# Altium PCB FOC-Lite.PcbDoc
Units mil, origin at the board's own origin, x right, y up, seen from the top; angles counter-clockwise.
Board outline 1339.16 x 1339.16 mil, 4 copper layers (Top1, Gnd2, Signal3, Bottom4), stack 41.067 mil thick; 59 components, 48 nets, 243 pads, 82 vias.
Unrouted connection lines stored in the file: 57.
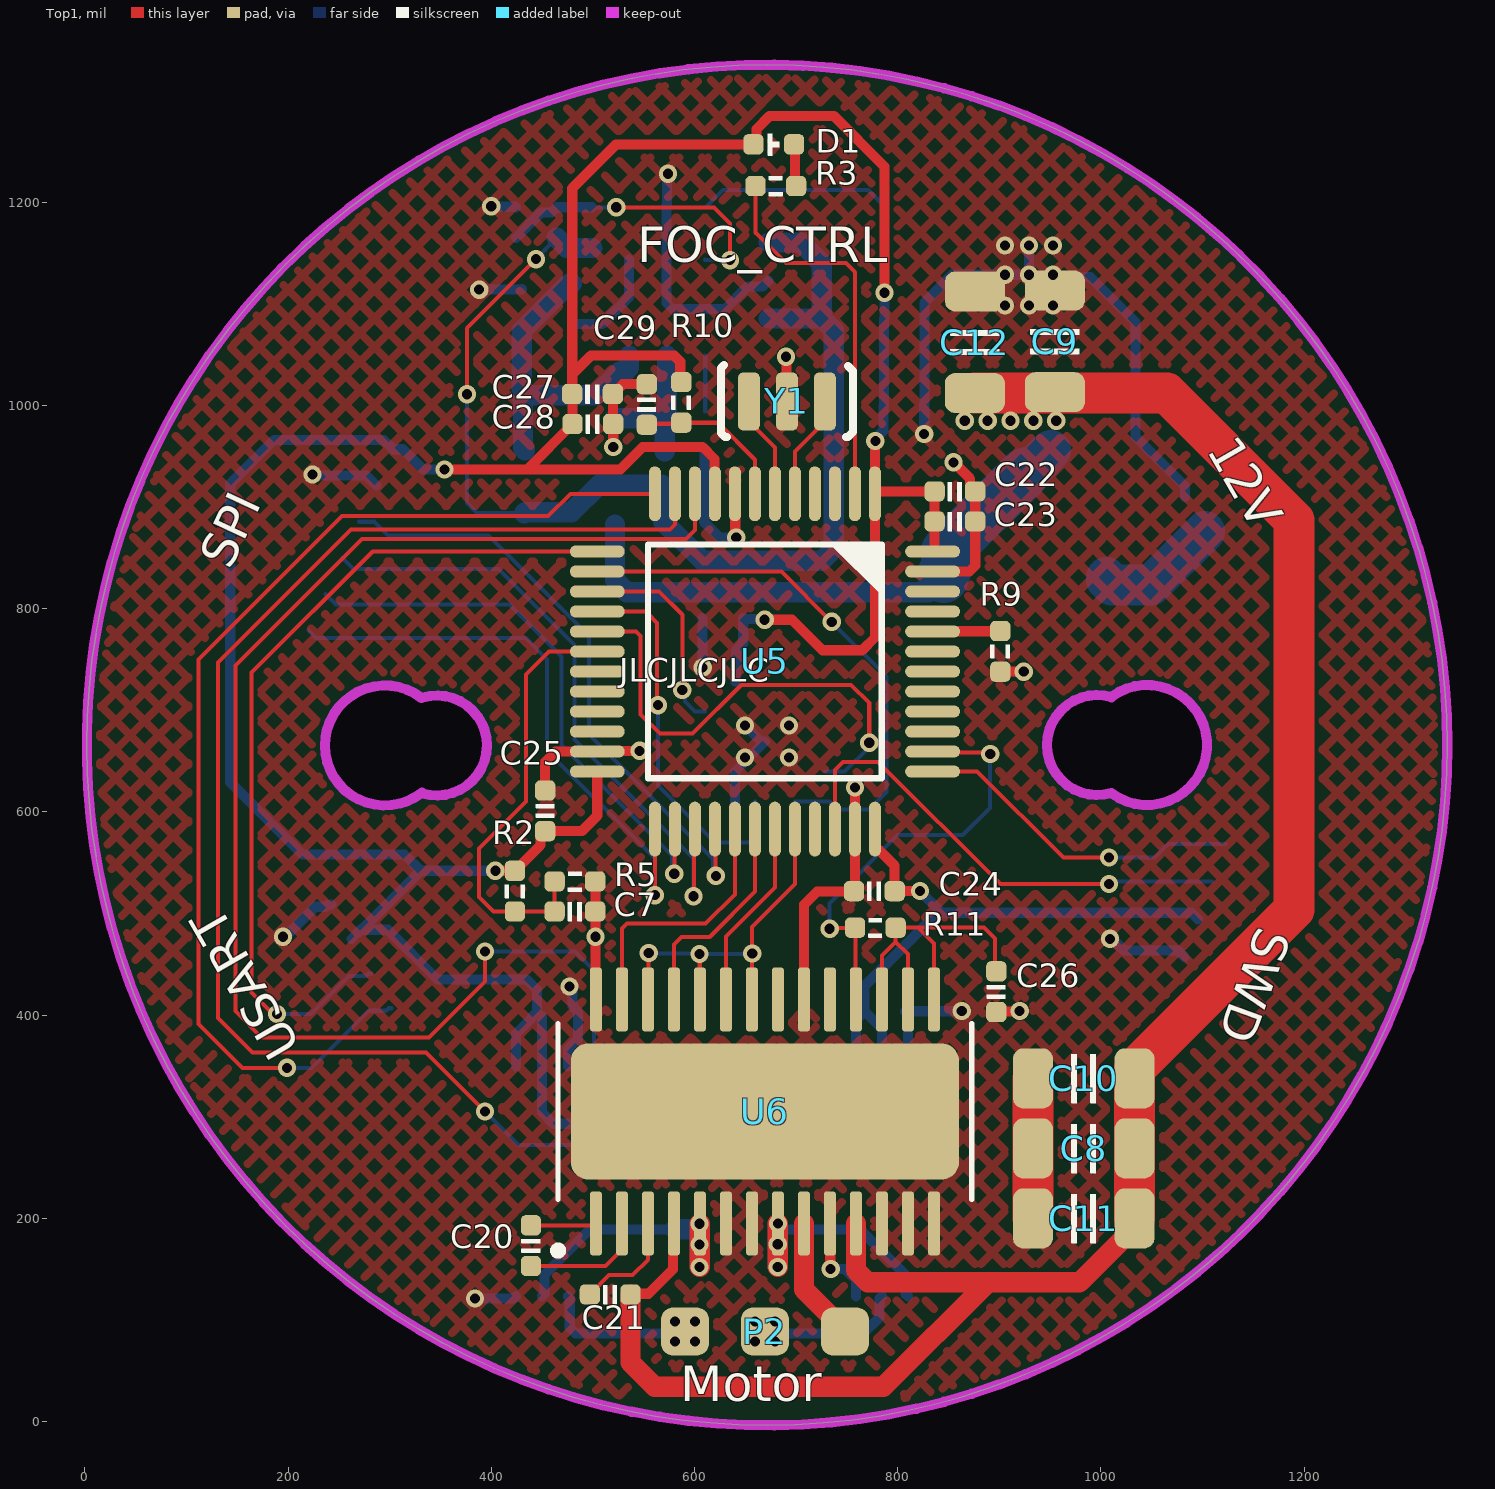
[diagram p0: Top1 view]
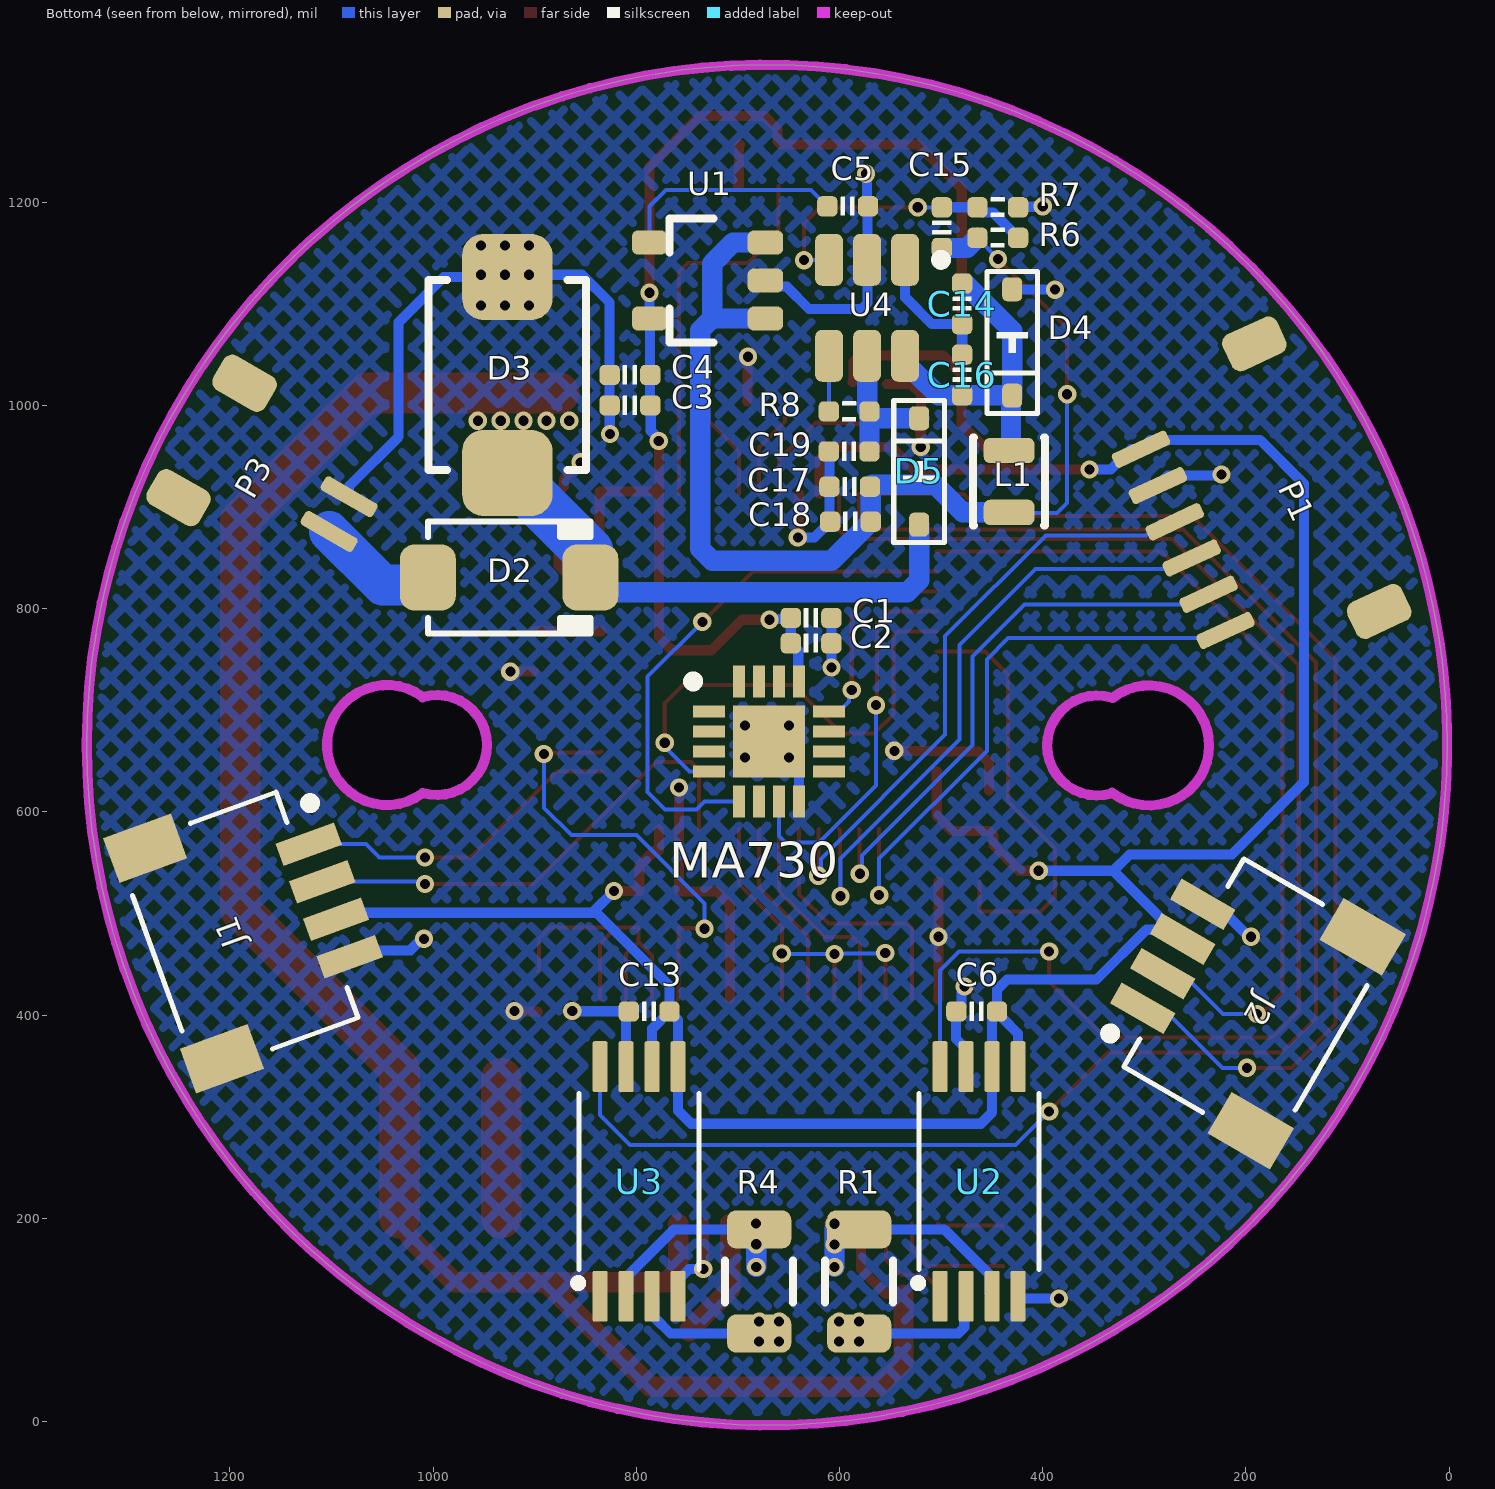
[diagram p1: Bottom4 view, seen from below]
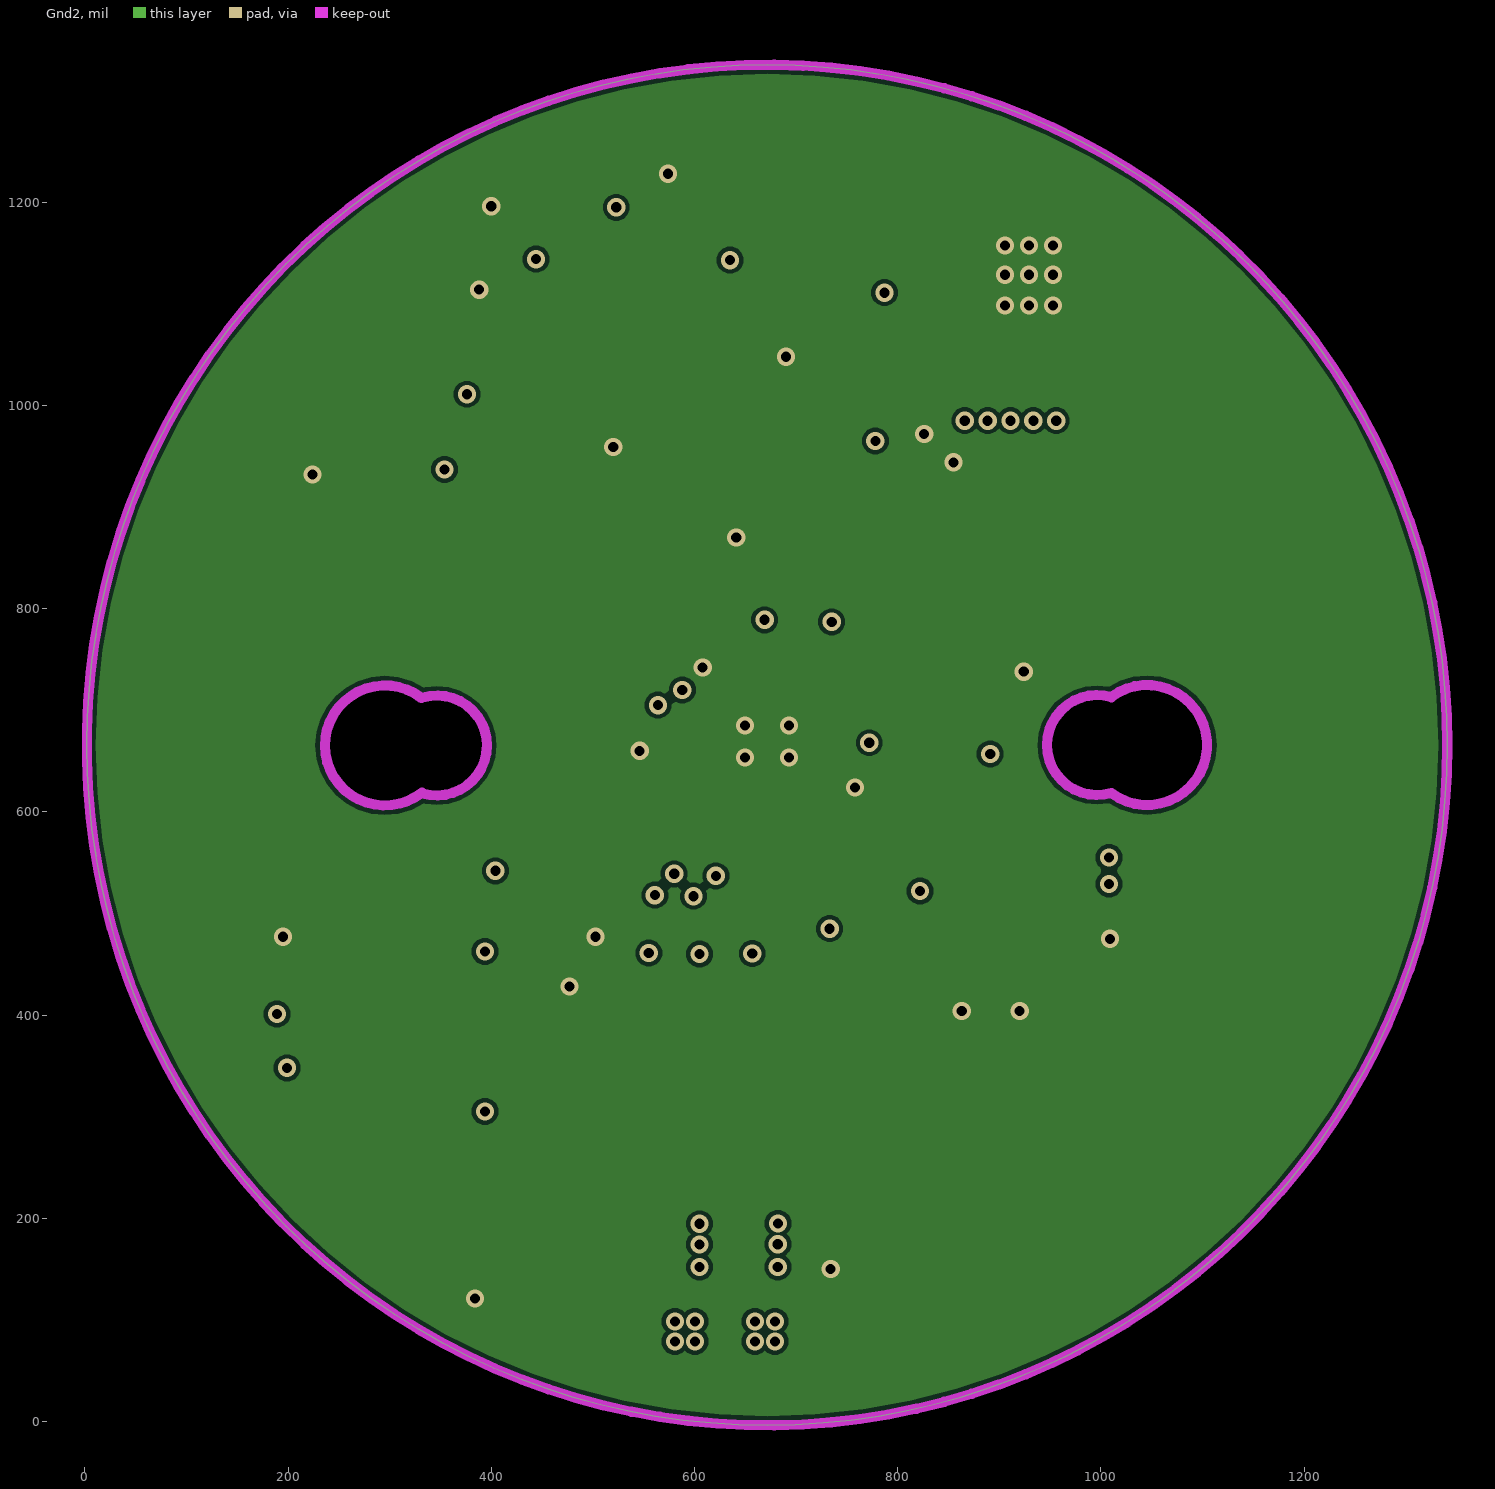
[diagram p2: Gnd2]
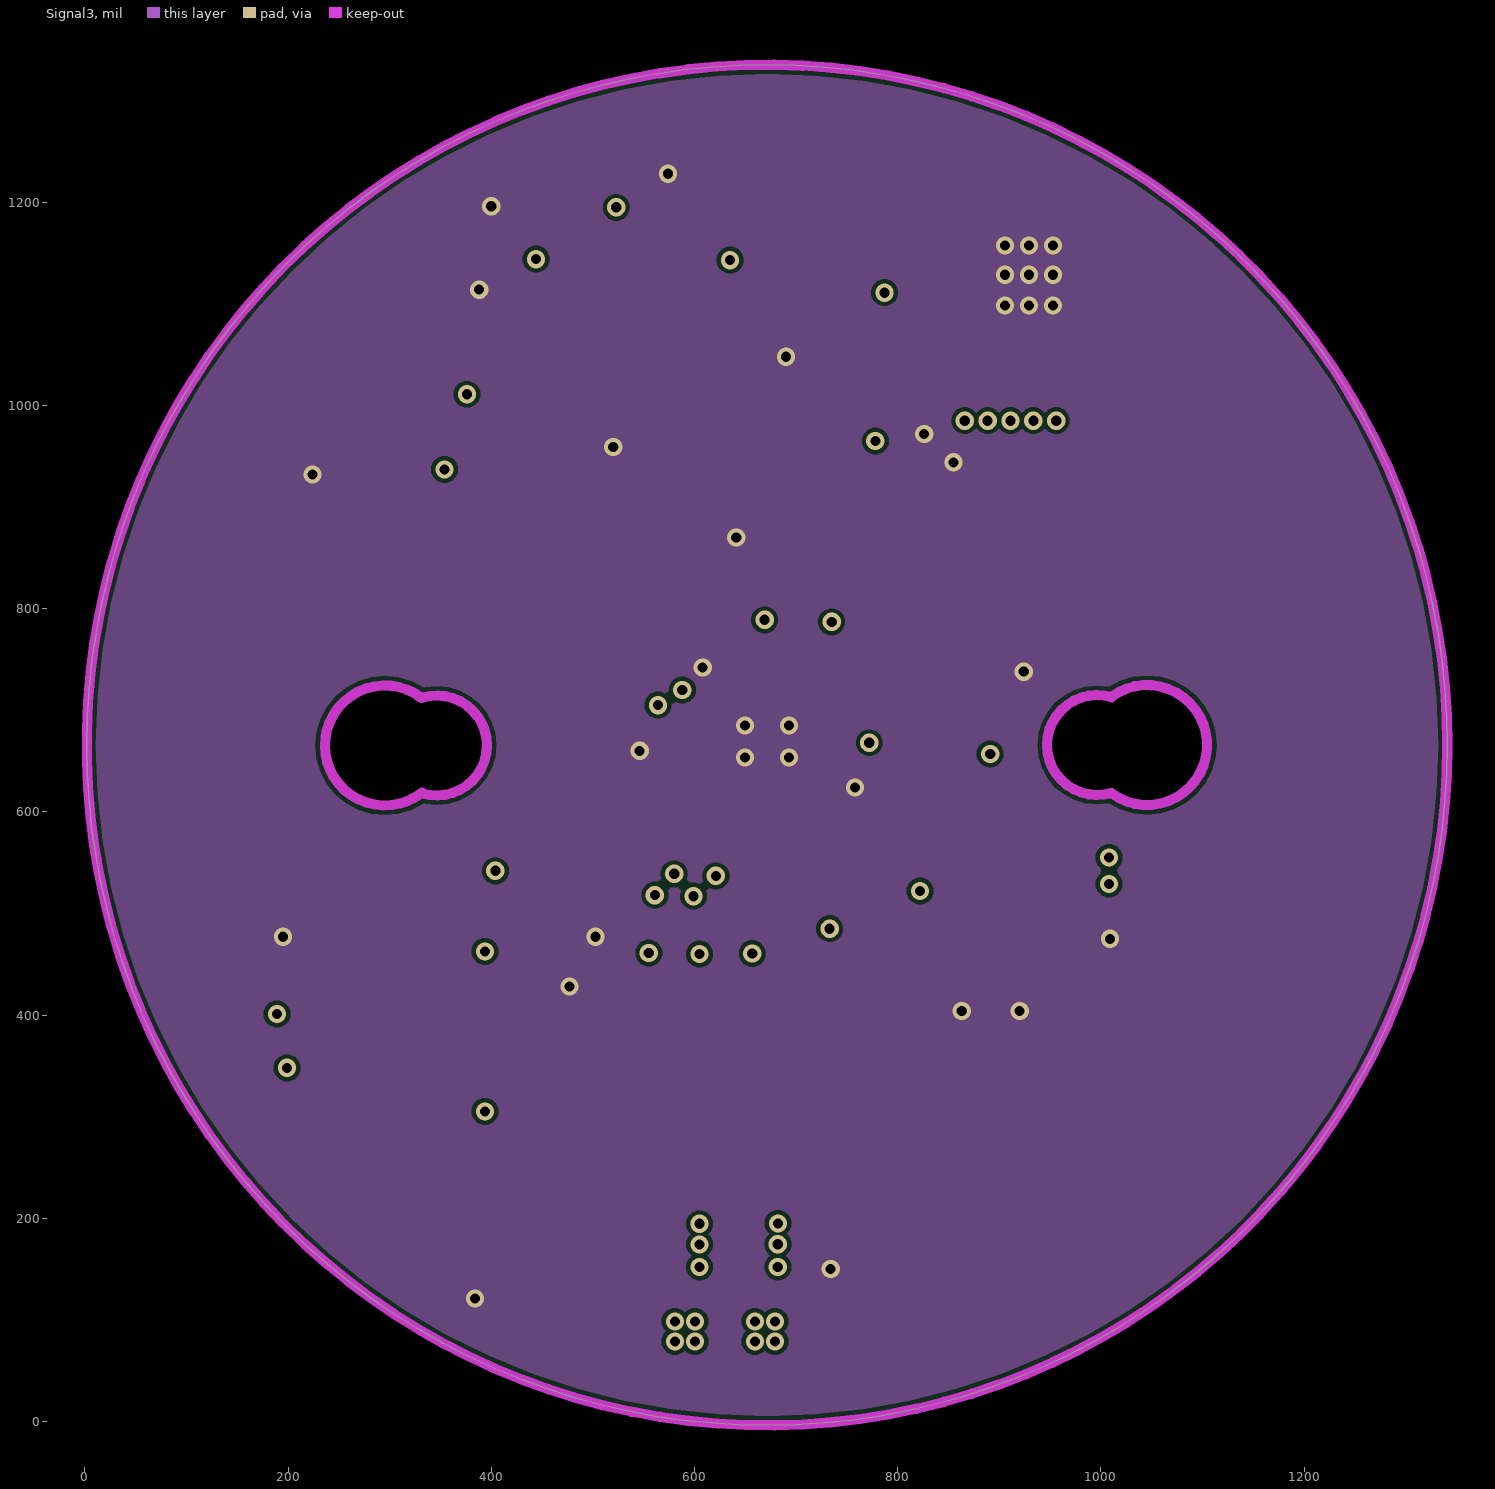
[diagram p3: Signal3]
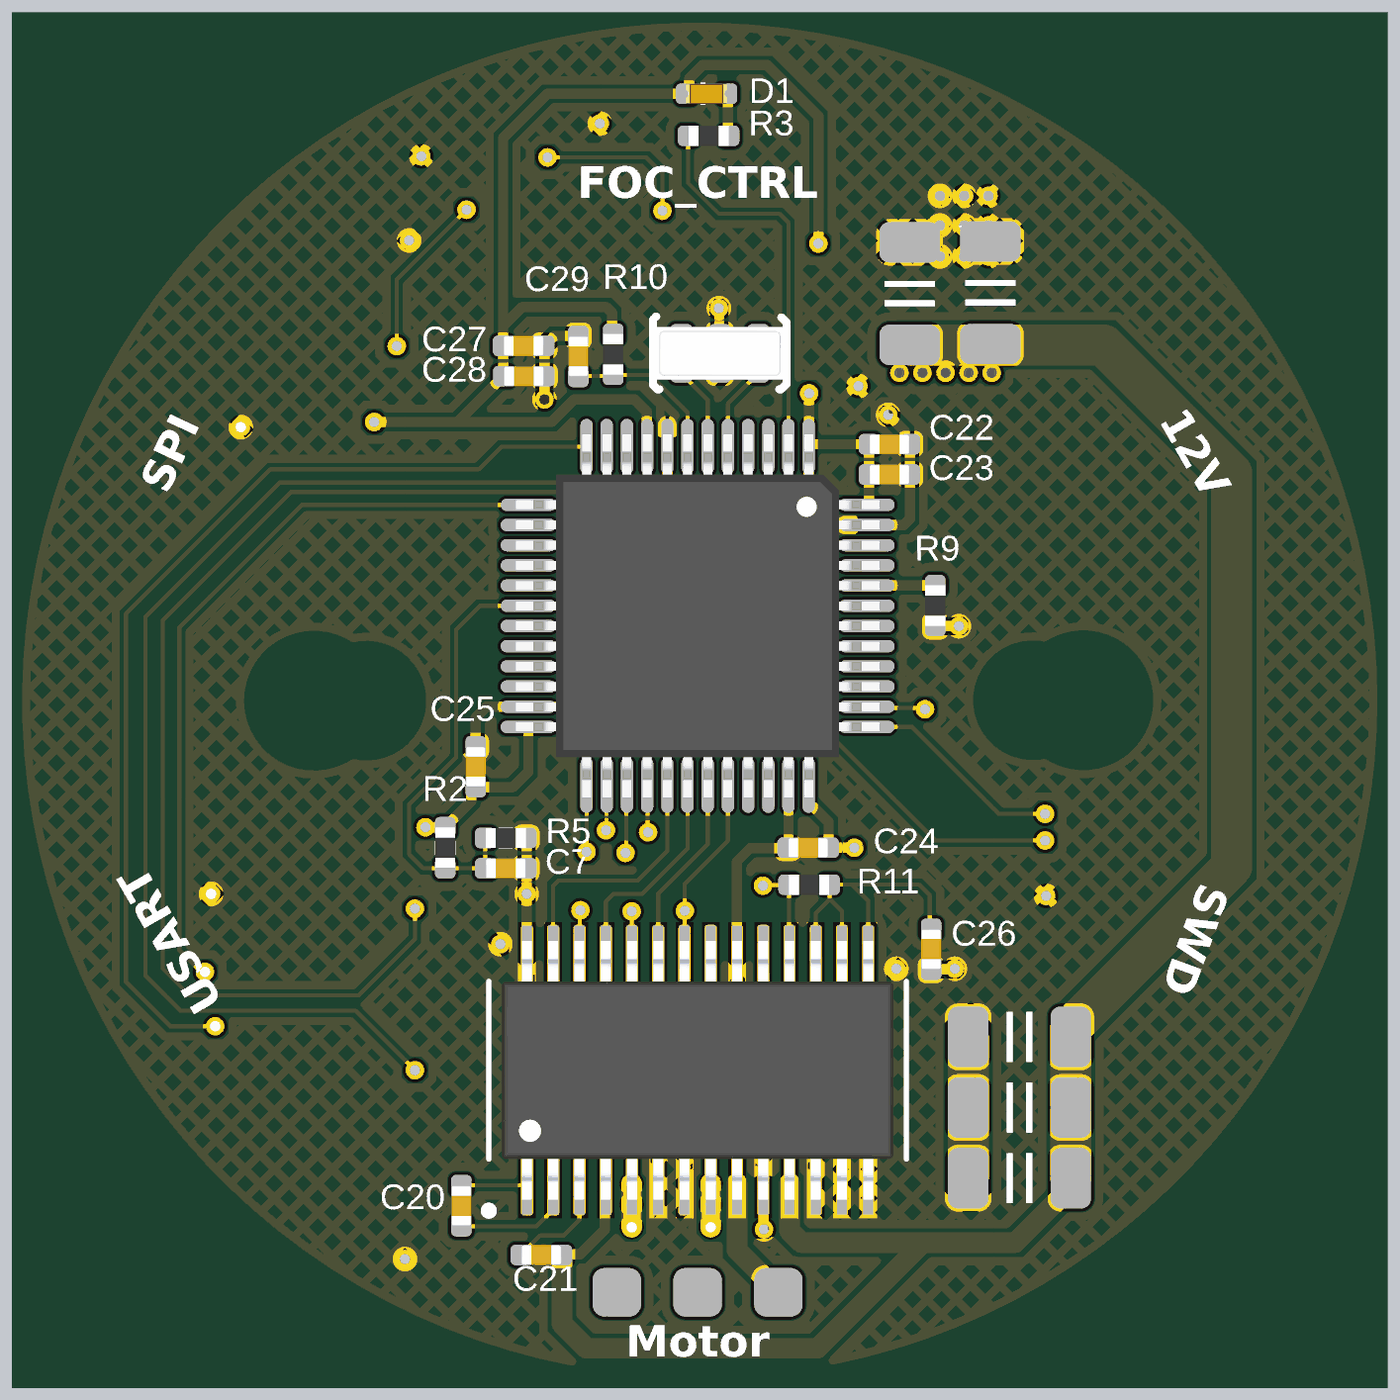
[diagram p4: 3D render of the assembled board from above, using the file's embedded part models]
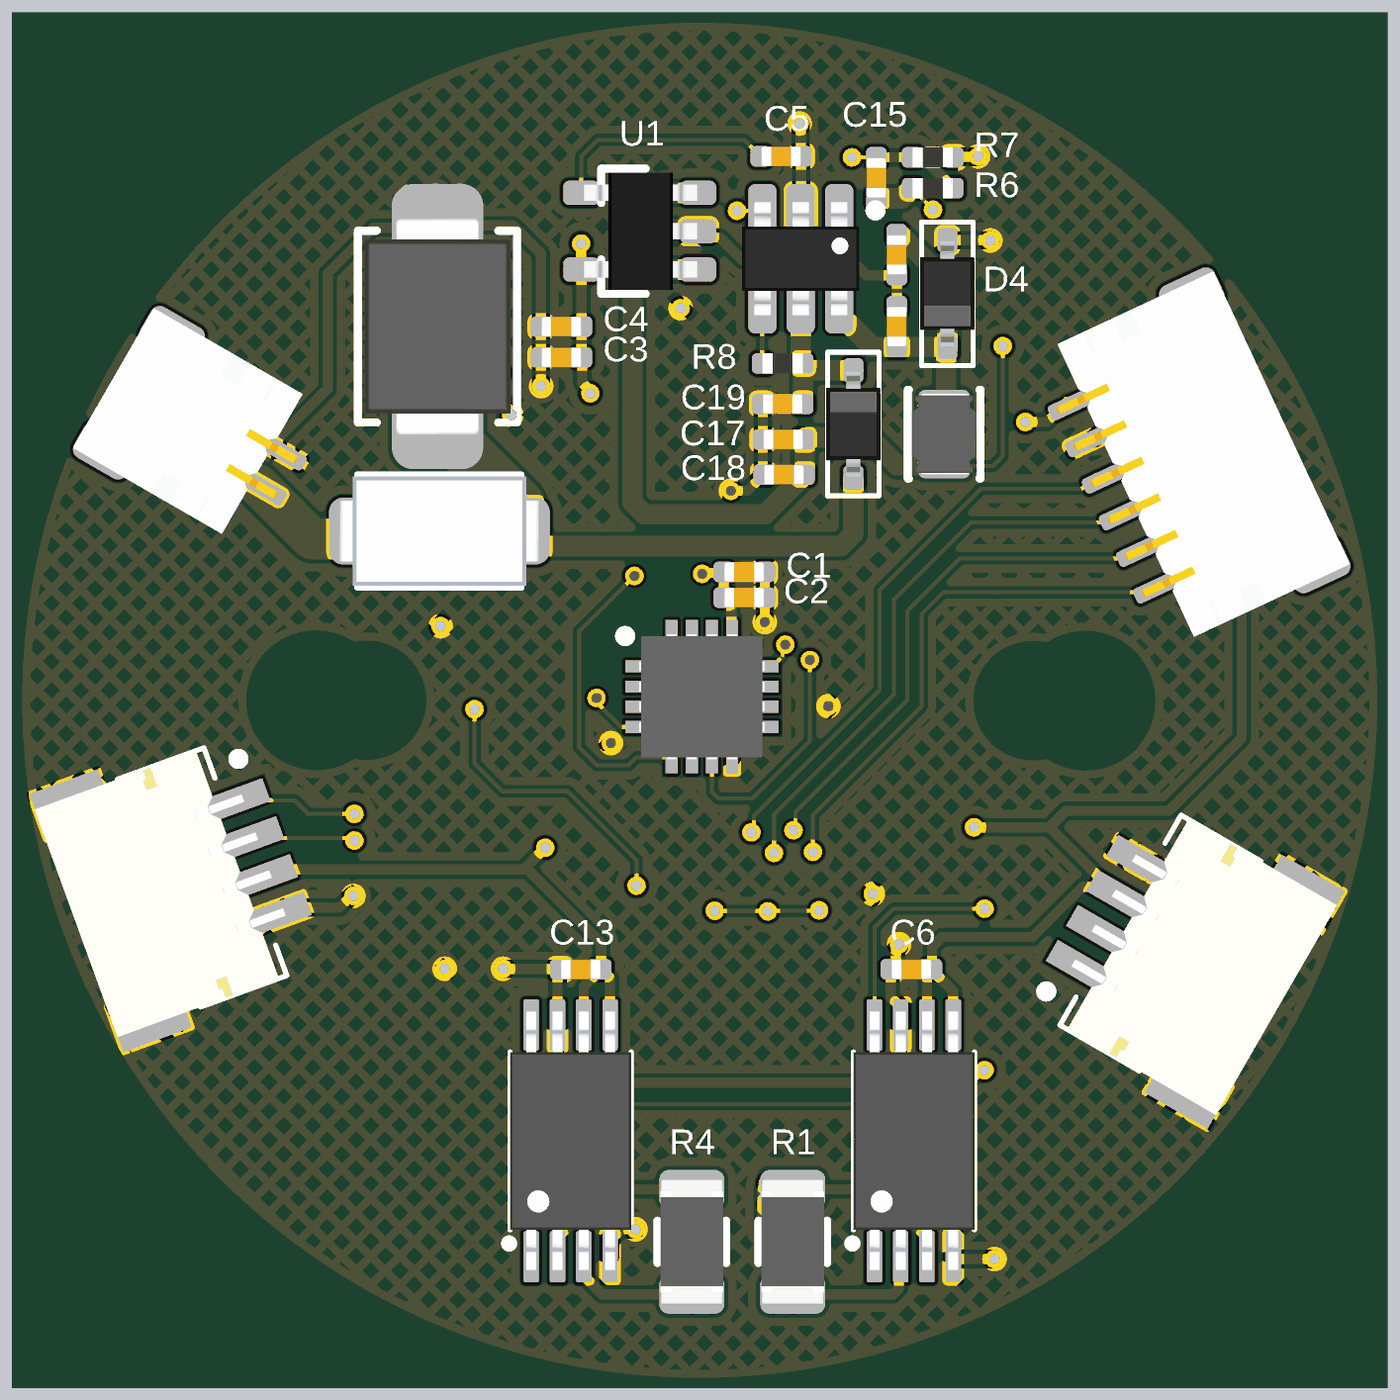
[diagram p5: 3D render of the assembled board from below, using the file's embedded part models]

## Layer stack, top to bottom
Top Solder: solder mask 0.4, Solder Resist, Dk 3.5
Top1: signal copper 1.4
Dielectric1: core 11.811, FR-4, Dk 4.2
Gnd2: signal copper 1.4169
Dielectric 2: prepreg 11.811, Dk 4.2
Signal3: signal copper 1.4169
Dielectric 3: core 11.811, Dk 4.2
Bottom4: signal copper 1.4
Bottom Solder: solder mask 0.4, Solder Resist, Dk 3.5

## Board outline
1.78,665.77 ccw(c671.36,665.77) 671.36,-3.81 ccw(c671.36,665.77) 1340.95,665.77 ccw(c671.36,665.77) 671.36,1335.35 ccw(c671.36,665.77)
cut-out: 331.81,618.96 cw(c295.28,665.35) 331.41,712.06 332.38,712.51 cw(c346.46,665.35)
cut-out: 1010.45,618.68 cw(c996.17,665.77) 1010.45,712.86 1010.36,713.32 cw(c1045.38,665.77)

## Design rules (kind name [scope] priority, off if disabled: settings)
Clearance Clearance_Logo [InNetClass('Logo')] p1: gap=8 ignorepadtopadclearanceinfootprint=FALSE
Clearance [All] p2: gap=4 ignorepadtopadclearanceinfootprint=FALSE except(0: Arc-Hole Track-Hole SMDPad-Hole THPad-Hole Via-Hole Fill-Hole Poly-Hole Region-Hole Text-Hole)
ComponentClearance [All] p1: gap=0 collisioncheckmode=3 verticalgap=0 showdistances=FALSE
DiffPairsRouting [All] p1: maxlimit=9 minlimit=9 mostfreqgap=9 toplayer_minwidth=15 toplayer_maxwidth=15 toplayer_prefwidth=15 midlayer1_minwidth=15 midlayer1_maxwidth=15 midlayer1_prefwidth=15 midlayer2_minwidth=15 midlayer2_maxwidth=15 midlayer2_prefwidth=15 bottomlayer_minwidth=15 bottomlayer_maxwidth=15 bottomlayer_prefwidth=15 maxuncoupledlength=500
FanoutControl Fanout_BGA [All] p1: bgadir=Out bgaviamode=Centered fanoutstyle=Auto fanoutdirection=Alternating viagrid=1 // Fanout_BGA (Default Rule)
HoleSize [All] p1: absolutevalues=TRUE maxlimit=10000 minlimit=8 maxpercent=80.000 minpercent=20.000
MinimumSolderMaskSliver [All] p1 off: minsoldermaskwidth=2
PlaneClearance [All] p1: clearance=8
PlaneConnect [All] p1: planeconnectstyle=Direct reliefexpansion=20 reliefentries=4 reliefconductorwidth=10 reliefairgap=10
PolygonConnect [All] p1: connectstyle=Direct reliefconductorwidth=10 reliefentries=4 polygonreliefangle="90 Angle" airgapwidth=10
RoutingVias [All] p1: holewidth=10 width=18 viastyle="Through Hole" minholewidth=6 minwidth=18 maxholewidth=28 maxwidth=50
SilkToSilkClearance [All] p1: silktosilkclearance=0
SilkToSolderMaskClearance [IsPad] p1: minsilkscreentomaskgap=0 clearancetoexposedcopper=TRUE
SolderMaskExpansion [All] p1: expansion=3 istentingtop=FALSE
Width Logo [InNetClass('Logo')] p1: maxlimit=100 minlimit=0.1 preferedwidth=10
Width GND [(InNet('AGND') OR InNet('GND'))] p2: maxlimit=50 minlimit=4 preferedwidth=10
Width VCC [(InNet('VDD_SYS_3.3V') OR InNet('VDD_AV_3.3V') OR InNet('VDD_5V') OR InNet('VDD1V2-SYS') OR InNet('VDD1V1-EPHY') OR InNet('VDD-CPUX') OR InNet('VDD-CPUS') OR InNet('VDD-CPUFB') OR InNet('VCC-DRAM'))] p3: maxlimit=50 minlimit=4 preferedwidth=10
Width [All] p4: maxlimit=10000 minlimit=4 preferedwidth=4
21 further rules are at their usual default settings.

## Components (designator, comment, footprint, x,y, rotation, side; value= is the part's Value field where it differs from the comment)
C1 "0.1uF" CAP_0402 628,790.84 r180 bottom value=0.1u
C2 "1uF" CAP_0402 628,765.84 r180 bottom value=0.1u
C3 "0.1uF" CAP_0402 806.25,1000.02 r180 bottom value=0.1u
C4 "10uF" CAP_0402 806.25,1030.02 r180 bottom value=0.1u
C5 "10nF" CAP_0402 592,1196 r0 bottom value=0.1u
C6 "0.1uF" CAP_0402 465,403.54 r0 bottom value=0.1u
C7 "10uF" CAP_0402 482.28,501.97 r180 top value=0.1u
C8 "100uF" 1206-CAP 983.09,268.75 r0 top value=0.1u
C9 "100uF" 1206-CAP 954.72,1062.99 r270 top value=0.1u
C10 "100uF" 1206-CAP 983.09,337.65 r0 top value=0.1u
C11 "100uF" 1206-CAP 983.09,199.85 r0 top value=0.1u
C12 "100uF" 1206-CAP 875.98,1062.2 r270 top value=0.1u
C13 "0.1uF" CAP_0402 787.4,403.54 r0 bottom value=0.1u
C14 "0.1uF" CAP_0402 479.25,1100.03 r270 bottom value=0.1u
C15 "100pF" CAP_0402 499.25,1175.03 r90 bottom value=0.1u
C16 "0.1uF" CAP_0402 479.25,1030.03 r90 bottom value=0.1u
C17 "0.1uF" CAP_0402 590,920 r180 bottom value=0.1u
C18 "10uF" CAP_0402 589.22,885.68 r180 bottom value=0.1u
C19 "10uF" CAP_0402 590.55,954.72 r180 bottom value=0.1u
C20 "10nF" CAP_0402 439,173 r270 top value=0.1u
C21 "0.1uF" CAP_0402 517,125 r0 top value=0.1u
C22 "0.1uF" CAP_0402 856.3,915.35 r180 top value=0.1u
C23 "0.1uF" CAP_0402 856.3,885.83 r180 top value=0.1u
C24 "0.1uF" CAP_0402 777,522 r0 top value=0.1u
C25 "0.1uF" CAP_0402 453,601 r270 top value=0.1u
C26 "0.47uF" CAP_0402 897,423 r90 top value=0.1u
C27 "0.1uF" CAP_0402 499.65,1011.25 r180 top value=0.1u
C28 "10uF" CAP_0402 499.96,981.72 r180 top value=0.1u
C29 "0.1uF" CAP_0402 553,1001 r270 top value=0.1u
D1 "color?" LED_0402_RED 678,1257 r0 top
D2 "SS54" DO-214AC 925.2,830.71 r180 bottom
D3 "SMBJ28CA" SMBJ-CA_MFG 927,1030 r270 bottom
D4 "二极管-5B5819WS" SOD-323 430,1062 r270 bottom
D5 "二极管-5B5819WS" SOD-323 521.65,935.04 r90 bottom
J1 "SM04B-SRSS-TB(LF)(SN)" JST_SM04B-SRSS-TB(LF)(SN) 1102.34,512.77 r250 bottom
J2 "SM04B-SRSS-TB(LF)(SN)" JST_SM04B-SRSS-TB(LF)(SN) 272.24,457.81 r120 bottom
L1 "6.8uH" IND-201612 433.07,925.2 r270 bottom
MA730 "MA730GQ-Z" QFN50P300X300X100-17N-D 669.29,669.29 r180 bottom
P1 "SH1.0-6P" SH1.0-6P 261.72,867.66 r65 bottom
P2 "电机接插件-3P" AMASS-MR30-M 669.29,88.58 r0 top
P3 "SH1.0-2P" SH1.0-2P 1092.52,893.03 r300 bottom
R1 "0.01R" 1206-RES 580.71,137.8 r90 bottom value=22R
R2 "NCP15XH103F03RC" RES_0402 423.23,521.97 r90 top value=10k
R3 "2K" RES_0402 680,1216 r0 top value=22R
R4 "0.01R" 1206-RES 679.13,137.8 r270 bottom value=22R
R5 "3.3K" RES_0402 482.28,531.5 r180 top value=22R
R6 "10K" RES_0402 444.25,1165.03 r0 bottom value=22R
R7 "1.8K" RES_0402 444.25,1195.03 r0 bottom value=22R
R8 "1M" RES_0402 590.55,994.09 r0 bottom value=22R
R9 "10K" RES_0402 901,758 r90 top value=22R
R10 "10K" RES_0402 587,1003 r90 top value=22R
R11 "10K" RES_0402 778,486 r180 top value=22R
U1 "LP2992 3V3" SOT23-5 732,1123 r0 bottom
U2 "INA240A2PWR" "SOP65 P640X120-8N" 462.6,236.22 r90 bottom
U3 "INA240A2PWR" "SOP65 P640X120-8N" 797.24,236.22 r90 bottom
U4 "ME3116" SOT23-6 572.87,1096.13 r270 bottom
U5 "STM32F103CBT6" LQFP-48 669.29,748.03 r270 top
U6 "DRV8313PWP" HTSSOP-28 669.29,305.12 r90 top
Y1 "8MHz" 晶振-3P 690.94,1003.94 r0 top

## Footprints (in the part's own frame and the unit in brackets; to place one, negate y for a bottom-side part, rotate by r counter-clockwise, add the part's x,y. Pads: shape width x height; smd on the part's side, far side on the other; paste and mask are expansions set on the pad)
1206-CAP [mm]
  rrect50% 1x1.5 smd: 1(-1.27,0) 2(1.27,0)
  silkscreen extent -0.3,-0.61 0.3,0.61, body extent -1.5,-0.75 1.5,0.75, height 1.5
1206-RES [mil]
  rrect50% 37.64x63.38 smd paste+0 mask+0: 1(-51.22,0) 2(51.22,0)
  silkscreen extent -21,-33 21,33, body extent -61,-31 61,31, height 26
AMASS-MR30-M [mm]
  rrect50% 1.2x1.2 smd: 1(-2,0) 2(0,0) 3(2,0)
CAP_0402 [mil]
  rrect50% 20x20 smd: 1(-20,0) 2(20,0)
  silkscreen extent -7,-9 7,9, body extent -20,-10 20,10, height 20
DO-214AC [mil] "SMA"
  rrect50% 55x65 smd: 1(-80,0) 2(80,0)
  silkscreen extent -80,-55 80,55, body extent -98,-53 98,53, height 85
HTSSOP-28 [mm]
  rrect50% 1.6x0.3 smd paste-2 mask+0: 1(-2.8,4.225) 2(-2.8,3.575) 3(-2.8,2.925) 4(-2.8,2.275) 5(-2.8,1.625) 6(-2.8,0.975) 7(-2.8,0.325) 8(-2.8,-0.325) 9(-2.8,-0.975) 10(-2.8,-1.625) 11(-2.8,-2.275) 12(-2.8,-2.925) 13(-2.8,-3.575) 14(-2.8,-4.225) 15(2.8,-4.225) 16(2.8,-3.575) 17(2.8,-2.925) 18(2.8,-2.275) 19(2.8,-1.625) 20(2.8,-0.975) 21(2.8,-0.325) 22(2.8,0.325) 23(2.8,0.975) 24(2.8,1.625) 25(2.8,2.275) 26(2.8,2.925) 27(2.8,3.575) 28(2.8,4.225)
  rrect25% 3.4x9.7 smd paste-6 mask+0: 29(0,0)
  silkscreen extent -3.58,-5.17 2.2,5.27, body extent -3.2,-4.85 3.2,4.85, height 1.2
IND-201612 [mil]
  rrect50% 25x50 smd paste+0 mask+0: 1(-30.46,0) 2(30.46,0)
  silkscreen extent -43,-35 43,35, body extent -39,-31 39,31, height 37
JST_SM04B-SRSS-TB(LF)(SN) [mm]
  rect 0.6x1.55 smd: 1(-1.5,0) 2(-0.5,0) 3(0.5,0) 4(1.5,0)
  rect 1.2x1.8 smd: S1(-2.8,-3.875) S2(2.8,-3.875)
  silkscreen extent -3,-4.58 3,0.48, body extent -3,-4.78 3,0.17, height 3.25
LED_0402_RED [mil]
  rrect50% 20x20 smd: 1(-20,0) 2(20,0)
  silkscreen extent -6,-10 6,10, body extent -20,-10 20,10, height 18
LQFP-48 [mil]
  oval 54x12 smd: 1(-165,108.27) 2(-165,88.58) 3(-165,68.9) 4(-165,49.21) 5(-165,29.53) 6(-165,9.84) 7(-165,-9.84) 8(-165,-29.53) 9(-165,-49.21) 10(-165,-68.9) 11(-165,-88.58) 12(-165,-108.27) 25(165,-108.27) 26(165,-88.58) 27(165,-68.9) 28(165,-49.21) 29(165,-29.53) 30(165,-9.84) 31(165,9.84) 32(165,29.53) 33(165,49.21) 34(165,68.9) 35(165,88.58) 36(165,108.27)
  oval 12x54 smd: 13(-108.27,-165) 14(-88.58,-165) 15(-68.9,-165) 16(-49.21,-165) 17(-29.53,-165) 18(-9.84,-165) 19(9.84,-165) 20(29.53,-165) 21(49.21,-165) 22(68.9,-165) 23(88.58,-165) 24(108.27,-165) 37(108.27,165) 38(88.58,165) 39(68.9,165) 40(49.21,165) 41(29.53,165) 42(9.84,165) 43(-9.84,165) 44(-29.53,165) 45(-49.21,165) 46(-68.9,165) 47(-88.58,165) 48(-108.27,165)
  silkscreen extent -115,-115 115,115, body extent -177,-177 177,177, height 61
QFN50P300X300X100-17N-D [mm]
  rect 0.8x0.3 smd: 1(-1.5,0.75) 2(-1.5,0.25) 3(-1.5,-0.25) 4(-1.5,-0.75) 9(1.5,-0.75) 10(1.5,-0.25) 11(1.5,0.25) 12(1.5,0.75)
  rect 0.3x0.8 smd: 5(-0.75,-1.5) 6(-0.25,-1.5) 7(0.25,-1.5) 8(0.75,-1.5) 13(0.75,1.5) 14(0.25,1.5) 15(-0.25,1.5) 16(-0.75,1.5)
  rect 1.8x1.8 smd: 17(0,0)
  silkscreen extent -2.02,1.38 -1.78,1.62, body extent -1.55,-1.55 1.55,1.55, height 1
RES_0402 [mil]
  rrect50% 20x20 smd: 1(-20,0) 2(20,0)
  silkscreen extent -7,-10 7,10, body extent -20,-10 20,10, height 14
SH1.0-2P [mm]
  rrect50% 0.4x1.5 smd: 1(-0.5,0) 2(0.5,0)
  rrect50% 1x1.5 smd: SH1(-1.651,-3.683) SH2(1.651,-3.683)
  body extent -2,-4.42 2,0.54, height 3.06
SH1.0-6P [mm]
  rrect50% 0.4x1.5 smd: 1(-2.5,0) 2(-1.5,0) 3(-0.5,0) 4(0.5,0) 5(1.5,0) 6(2.5,0)
  rrect50% 1x1.5 smd: SH1(-3.691,-3.683) SH2(3.691,-3.683)
  body extent -4,-4.42 4,0.54, height 3.14
SMBJ-CA_MFG [mm]
  rrect50% 2.16x2.26 smd paste+0 mask+0: 1(-2.45,0) 2(2.45,0)
  silkscreen extent -2.37,-1.97 2.37,1.97, body extent -2.7,-1.81 2.7,1.81, height 2.62
SOD-323 [mm]
  rrect50% 0.6x0.5 smd: 1(-1.329,0) 2(1.329,0)
  silkscreen extent -1.78,-0.64 1.78,0.64, body extent -1.3,-0.68 1.3,0.67, height 1.15
"SOP65 P640X120-8N" [mm]
  rrect25% 1.27x0.381 smd: 1(-2.87,0.975) 2(-2.87,0.325) 3(-2.87,-0.325) 4(-2.87,-0.975) 5(2.87,-0.975) 6(2.87,-0.325) 7(2.87,0.325) 8(2.87,0.975)
  silkscreen extent -2.64,-1.5 2.2,1.62, body extent -3.2,-1.5 3.2,1.5, height 1.2
SOT23-5 [mm] "SOT23, 3-Leads, Body 3.1x3.0mm (max), Pitch 0.95mm, IPC Medium Density"
  rrect50% 0.889x0.6 smd: 1(-1.5,0.95) 2(-1.5,0) 3(-1.5,-0.95) 4(1.396,-0.95) 5(1.396,0.95)
  silkscreen extent -0.2,-1.55 0.9,1.55, body extent -1.48,-1.45 1.32,1.45, height 1.2
SOT23-6 [mm]
  rrect50% 1.3x0.7 smd: 1(-1.2,0.95) 2(-1.2,0) 3(-1.2,-0.95) 4(1.2,-0.95) 5(1.2,0) 6(1.2,0.95)
  silkscreen extent -1.32,1.73 -1.08,1.97, body extent -1.4,-1.45 1.4,1.45, height 1.45
晶振-3P [mm] "贴片晶振"
  rrect50% 0.55x1.45 smd: 1(-0.95,0) 2(0,0) 3(0.95,0)
  silkscreen extent -1.65,-0.89 1.65,0.91, body extent -1.6,-0.89 1.65,0.89, height 0.7

## Part data
C1 C2 C3 C4 C5 C6 C7 C13 C14 C15 C16 C17 C18 C19 C20 C21 C22 C23 C24 C25 C26 C27 C28 C29: library part 电容-0402, "Capacitor"
C8 C9 C10 C11 C12: library part 电容-1206, "Capacitor"
D1: library part LED_0402, "LED", Type=0402
D2: library part Diode_SMA, "Diode", Type=SMA
D4 D5: library part 二极管-5B5817WS, "40V"
J1 J2: "Connector Header Surface Mount, Right Angle 4 position 0.039 _1.00mm_", Package=None, Availability=Unavailable, MF="JST Sales", MP=SM04B-SRSS-TB_LF__SN_, Price=None, SnapEDA_Link=https://www.snapeda.com/parts/SM04B-SRSS-TB%28LF%29%28SN%29/JST%20Sales%20America%20Inc./view-part/557466/?ref=snap
L1: library part 电感-201612
MA730: "Integrated Circuit", Manufacturer_Name="Monolithic Power Systems (MPS)", Mouser Part Number=946-MA730GQ-Z, Datasheet Link=https://www.monolithicpower.com/pub/media/document/m/a/ma730_r1.01.pdf, Height=1mm, Manufacturer_Part_Number=MA730GQ-Z, Mouser Price/Stock=https://www.mouser.co.uk/ProductDetail/Monolithic-Power-Systems-MPS/MA730GQ-Z?qs=YCa%2FAAYMW01z3klrRj76PA%3D%3D
P2: "AMASS MR30"
R1 R4: library part 电阻-1206, "Resistor"
R2: "THERMISTOR 10K OHM NTC 0402 SMD"
R3 R5 R6 R7 R8 R9 R10 R11: library part 电阻-0402, "Resistor"
U1: library part LP2992, "LDO"
U2 U3: "-4 to 80V, bidirectional, ultra-precise current sense amplifier with enhanced PWM rejection 8-TSSOP -40 to 125", Package="TSSOP-8 Texas Instruments", Availability=Good, MF="Texas Instruments", MP=INA240A2PWR, Price=None, Purchase-URL=https://pricing.snapeda.com/search/part/INA240A2PWR/?ref=eda, SnapEDA_Link=https://www.snapeda.com/parts/INA240A2PWR/Texas%20Instruments/view-part/588604/?ref=snap
U4: "DC-DC"
U5: "ARM Cortex-M3 32-bit MCU, 128 KB Flash, 20 KB Internal RAM, 37 I/Os, 48-pin LQFP, -40 to 85 degC, Tray", I/Os (High Current)=37, Operating Frequency(F) (Processor speed) (MHz)=72, Supplier Part Number 1=497-6288-ND, Supply Voltage(Vcc) min (V)=2, A/D Converter="2x12-bit (10 Channel)", ComponentLink1Description="Manufacturer URL", ComponentLink1URL=http://www.st.com/web/en/home.html, ComponentLink2Description=Datasheet, ComponentLink2URL=http://www.st.com/st-web-ui/static/active/en/resource/technical/document/datasheet/CD00161566.pdf, ComponentLink3Description="Package Specification", ComponentLink3URL=http://www.st.com/st-web-ui/static/active/en/resource/technical/document/datasheet/DM00058181.pdf, Core="ARM Cortex-M3", DatasheetVersion="Rev. 16", FLASH Size (Prog) (kB)=128, Internal RAM Size (kB)=20, Mounting Technology="Surface Mount", PackageDescription="48-Pin Low Profile Quad Flat Package, 7 x 7 mm Body, 0.5 mm Pitch", PackageReference=LQFP48, PackageVersion="Rev. 6, 06/2013", Packing=Tray, PartNumber=STM32F103CBT6, Supplier 1=Digi-Key, Supplier 2=Farnell, Supplier 3=Newark, Supplier 4=Newark, Supplier 5=Mouser, Supplier Part Number 2=1606327, Supplier Part Number 3=11N8296, Supplier Part Number 4=57P1214, Supplier Part Number 5=511-STM32F103CBT6
U6: "65-V max, 3-A peak 3-phase motor driver 28-HTSSOP -40 to 125", Package="HTSSOP-28 Texas Instruments", Availability=Good, MF="Texas Instruments", MP=DRV8313PWP, Price=None, Purchase-URL=https://pricing.snapeda.com/search/part/DRV8313PWP/?ref=eda, SnapEDA_Link=https://www.snapeda.com/parts/DRV8313PWP/Texas%20Instruments/view-part/287728/?ref=snap
Y1: library part 晶振-3Pin, "村田贴片"

## Via types
v1: diameter 18, hole 10, Top1 to Bottom4, 82 vias

## Nets (pads, with @x,y where several pads share a name; then routed paths per layer and width w, separated by ;. In a path a pad name is that pad's centre, name@x,y a point inside that pad or via, vN(x,y) a via of type N, cw(c..) or ccw(c..) an arc to the next point about the centre after c; other vN are vias at no path point)
3V3: C1.1 C2.1 C3.2 C4.2 C6.1 C13.1 C22.2 C23.2 C24.2 C25.2 C27.2 C28.2 D1.1 J1.3 J2.3 MA730.13 P1.6 R2.2 R10.2 U1.5 U2.5 U2.6 U3.5 U3.6 U5.1 U5.9 U5.24 U5.36 U5.48 | length 4380.1
  Top1 w10: v1(354,937) 435.24,937 ; v1(404,541.97) R2.2 448.49,567.23 448.49,576.49 C25.2 489,581 504.29,596.29 U5.24 ; R10.2 586,1024 586,1043.14 580.14,1049 498,1049 479.65,1030.65 ; U5.9 619.7,913.41 619.7,947.3 607.98,959.02 549,959.02 526.98,937 435.24,937 ; v1(669,789) 696,789 726,759 765,759 777.56,771.56 U5.1 777.78,913.25 U5.1@777.78,914.65 ; U5.36 777.56,562.57 778.48,561.65 782.35,561.65 797,547 C24.2 v1(822,522) ; v1(778,965) 777.78,964.78 U5.1@777.78,914.65 ; v1(787,1111) 787,1235 737,1285 674,1285 661.14,1272.14 661.14,1260.14 D1.1 523,1257 479.65,1213.65 479.65,1030.65 ; U5.48 835.38,856.3 836.3,857.22 C23.2 C22.2 778.48,915.35 U5.1@777.78,914.65 ; 435.24,937 C28.2 479.8,981.88 479.8,1011.09 C27.2 479.65,1030.65
  Bottom4 w10: J2.3 271.54,484 298,484 347,435 435,435 445,425 C6.1 ; J2.3@272.54,484 330.51,541.97 ; v1(354,937) 332.97,937 313.1,956.87 P1.6 294.19,966 186,966 143,923 143,629 214,558 314.48,558 330.51,541.97 ; v1(404,541.97) 330.51,541.97 ; U2.5 424.3,349.3 424.3,381.74 440,397.44 440,398.54 C6.1@444.45,402.99 ; C6.1@449.8,398.74 U2.6 449.8,304.2 461,293 746,293 758.86,305.86 U3.5 758.86,395 C13.1 ; MA730.13 640.67,729.25 640.67,758.51 C2.1 C1.1 648.92,789.92 668.08,789.92 v1(669,789) ; v1(778,965) 778,967.16 785.86,975.02 785.86,999.63 C3.2 786.6,1000.37 786.6,1085.25 U1.5 786.94,1106.94 787,1107 v1(787,1111) ; U3.6 784.45,386.5 C13.1 ; v1(822,522) 843.34,500.66 ; J1.3 1089.22,500.66 843.34,500.66 ; C13.1 767.4,428.82 839.25,500.66 843.34,500.66
5V: C15.1 C17.2 C18.2 L1.2 R6.2 U1.1 U1.3 | length 1169.7
  Top1 w4: v1(376,1011) 376,1076 v1(444,1144)
  Bottom4 w4: v1(376,1011) 376,904 386,894 L1.2@432.34,894 ; v1(444,1144) 444,1144.39 464.25,1164.64 R6.2
  Bottom4 w20: L1.2@432.34,894 L1.2 478.73,894.73 506,922 568,922 C17.2 569.22,919.22 C18.2 607.9,847 725.28,847 737,858.72 737,1073.88 725.28,1085.6 ; R6.2 474.25,1155.03 C15.1 ; U1.1 725.28,1085.6 ; U1.3 704.6,1160.4 725.28,1139.72 725.28,1085.6
ADC1_1: C7.2 R2.1 R5.2 U5.18 | length 427.4
  Top1 w4: R5.2 C7.2 R2.1 402.03,501.97 388,516 388,564 434,610 434,735 456.87,757.87 U5.18
AGND: C1.2 C2.2 C3.1 C4.1 C5.1 C6.2 C7.1 C8.1 C9.1 C10.1 C11.1 C12.1 C13.2 C17.1 C18.1 C19.1 C22.1 C23.1 C24.1 C25.1 C26.1 C27.1 C28.1 C29.1 D3.1 D4.1 J1.4 J1.S1 J1.S2 J2.4 J2.S1 J2.S2 MA730.8 MA730.17 P1.5 P3.1 R5.1 R7.1 R9.1 U1.2 U2.4 U2.7 U3.4 U3.7 U4.2 U5.8 U5.23 U5.35 U5.47 U6.6 U6.7 U6.10 U6.12 U6.13 U6.14 U6.20 U6.28 U6.29 Y1.2 | length 2703.5
  Top1 w10: C25.1 453,649 463.45,659.45 U5.23 504.57,659.72 545.72,659.72 v1(546,660) ; R5.1 502.45,531.33 502.45,477.17 v1(502.62,477) 502.62,415.69 U6.28 ; v1(520,959) 519.98,981.57 519.82,981.72 519.82,1011.07 C27.1 529.39,1021 C29.1 ; U5.8 640.15,912.65 640.15,870.85 v1(641,870) ; v1(690,1048) 690.47,1047.53 690.47,1004.41 Y1.2 ; U6.20 707.68,508.68 720.65,521.65 756.65,521.65 757.87,522.87 U5.35 U5.35 757.94,623.94 v1(758,624) ; U6.10 733.63,194.52 733.63,150.37 v1(734,150) ; U5.47 870.44,836.61 876.3,842.47 C23.1 C22.1 871.3,920.35 871.3,927.7 v1(855,944) ; C26.1 897.5,403.5 919.5,403.5 v1(920,404) ; R9.1 v1(924,738)
  Top1 w40: C11.1 C8.1 C10.1
  Bottom4 w10: v1(195,477) 197.16,477 226.7,506.54 236.22,506.54 236.64,506.96 237.71,506.96 239.71,508.96 J2.4 ; v1(224,932) 224.83,931.17 276.7,931.17 P1.5 ; v1(384,121) 421.98,121 U2.4 ; v1(388,1114) 388.17,1114.17 429.83,1114.17 D4.1 ; v1(400,1196) 400.48,1195.52 423.76,1195.52 R7.1 ; U2.7 475.39,366.71 485.37,376.69 485.37,403.17 C6.2 480,408.54 480,422.84 477,425.84 v1(477,428) ; v1(574,1228) 573,1227 573,1197 C5.1 572.43,1195.57 572.43,1100.86 578.29,1095 630,1095 651.94,1116.94 666.89,1116.94 U1.2 ; v1(608,742) C2.2 C1.2 ; C19.1 609.88,954.06 609.88,886.34 C18.1 624.9,870 v1(641,870) ; MA730.8 639.76,639.76 MA730.17 665.35,669.29 v1(649.61,685.04) ; v1@734,150 747.94,150 754.7,143.23 756.36,143.23 758.86,140.73 U3.4 ; U3.7 810.04,400.91 C13.2 807.63,403.77 862.77,403.77 v1(863,404) ; v1(826,972) 826.12,972.12 826.12,999.9 C3.1 C4.1 826.25,1101.25 853.59,1128.59 v1(905.51,1128.59) 924.87,1128.59 D3.1 ; v1(929.13,1157.48) v1(929.13,1128.59) D3.1 ; v1(1009,475) 1011.16,475 1022.5,463.67 1075.75,463.67 J1.4 ; P3.1 1082.68,920.67 1034,969.35 1034,1082 989.54,1126.46 952.76,1126.46 D3.1
  other v1: 649.61,653.54 692.91,653.54 692.91,685.04 905.51,1098.43 929.13,1098.43 952.76,1098.43 952.76,1128.59 905.51,1157.48 952.76,1157.48
DRV_EN_1: U5.32 U6.22 U6.24 U6.26 | length 378.4
  Top1 w4: U6.26 554.57,415.79 554.57,460.57 v1(555,461) ; v1(605,460) 605.16,459.84 605.16,415.51 U6.24 ; U6.22 656.5,486.5 698.82,528.82 U5.32
  Bottom4 w4: v1(555,461) 555.5,460.5 604.5,460.5 v1(605,460) 605.26,460.26 656.55,460.26 v1(656.81,460.52)
DRV_FAULT_1: R11.2 U5.38 U6.18 | length 429.1
  Top1 w4: v1(733,485) 733.5,485.5 757.5,485.5 R11.2 758.43,485.57 758.43,415.78 U6.18 ; U5.38 835.52,658.22 889.78,658.22 v1(891,657)
  Bottom4 w4: v1(733,485) 733,510 800,577 864,577 891,604 v1(891,657)
I2C1_SCL_1: U5.42
I2C1_SDA_1: U5.43
LED1_1: R3.1 U5.2 | length 378.1
  Top1 w4: R3.1 660,1170 690,1140 749,1140 757.87,1131.13 U5.2
MOTOR_A_1: P2.1 R1.1 U2.2 | length 147.3
  Top1 w10: v1(580.71,98.43) v1(600.39,98.43)
  Bottom4 w10: U2.2 477.21,121.41 477.21,92.43 483.07,86.57 R1.1@570.87,86.57
  other v1: 580.71,78.74 600.39,78.74
MOTOR_A_CS_1: R1.2 U2.3 U6.5 | length 264.1
  Top1 w20: v1(605,152) v1(605,194.57)
  Bottom4 w10: U2.3 452.3,125.73 452.3,144.27 497.05,189.02 R1.2
  Bottom4 w20: R1.2 R1.2@596.18,189.02 ; v1(605,152) R1.2@605,189.02
  other v1: 605,174.26
MOTOR_B_1: P2.2 R4.2 U3.3 | length 196.6
  Top1 w10: v1(659.45,98.43) v1(679.13,98.43) v1(659.45,78.74) v1(679.13,78.74)
  Bottom4 w10: v1(679.13,78.74) R4.2 ; R4.2@688.98,86.57 766.33,86.57 781.95,102.19 781.95,120.73 U3.3
MOTOR_B_CS_1: R4.1 U3.2 U6.8 | length 251.9
  Top1 w20: v1(682,152) 682,194.8 v1(682.09,194.88)
  Bottom4 w10: R4.1@682.09,189.02 762.79,189.02 807.54,144.27 807.54,125.73 U3.2
  Bottom4 w20: v1(682,152) 682,194.8 v1(682.09,194.88)
  other v1: 682,174.38
MOTOR_C_1: P2.3 U6.9 | length 123
  Top1 w20: U6.9 707.68,129.92 748.03,89.56 P2.3
NetC5_2: C5.2 U1.4 | length 223.8
  Bottom4 w4: C5.2 628,1212 771,1212 786.94,1196.06 U1.4
NetC14_1: C14.1 C16.1 D4.2 L1.1 U4.6 | length 314.4
  Bottom4 w20: D4.2@430,1008.01 431.16,1006.85 431.16,958.16 433.07,956.25 L1.1 ; D4.2 430,1073.45 476.58,1120.03 C14.1 ; D4.2@430.16,1009.82 435.01,1009.82 435.22,1010.03 C16.1 479.28,1009.99 502.99,1009.99 526.3,1033.3 531.69,1033.3 535.47,1037.08 U4.6
NetC14_2: C14.2 C16.2 U4.1 | length 134.1
  Bottom4 w10: C16.2 C14.2 509.03,1080.03 535.47,1106.47 U4.1
NetC15_2: C15.2 R6.1 R7.2 U4.3 | length 290.7
  Top1 w4: v1(523,1195) 619,1195 635,1179 v1(635,1143)
  Bottom4 w4: C15.2@499.26,1195.02 v1(523,1195) ; U4.3 610.65,1143 v1(635,1143)
  Bottom4 w10: R6.1 449.25,1190.03 459.25,1190.03 R7.2 C15.2
NetC19_2: C19.2 D5.2 R8.1 U4.5 | length 146.8
  Bottom4 w20: D5.2 563.83,987.38 R8.1 ; C19.2 R8.1 ; U4.5 572.87,996.41 R8.1
NetC20_1: C20.1 U6.1 | length 64.7
  Top1 w4: C20.1 501.07,193 U6.1
NetC20_2: C20.2 U6.2 | length 121.9
  Top1 w4: C20.2 512.25,153 528.54,169.29 U6.2
NetC21_1: C21.1 U6.3 | length 107
  Top1 w4: C21.1 516,144 539,144 554.13,159.13 U6.3
NetD1_2: D1.2 R3.2 | length 41.8
  Top1 w10: D1.2 699,1256 699,1217 R3.2
NetR8_2: R8.2 U4.4 | length 54.9
  Bottom4 w4: U4.4 610.55,1048.61 R8.2
NetR9_2: R9.2 U5.44 | length 66.9
  Top1 w10: U5.44 834.51,777.78 900.78,777.78 R9.2
NetU5_5: U5.5 Y1.3 | length 103.1
  Top1 w4: U5.5 698.82,954.72 719.85,975.75 719.85,975.87 728.35,984.37 Y1.3
NetU5_6: U5.6 Y1.1 | length 101.5
  Top1 w4: Y1.1 653.54,984.37 662.04,975.87 662.04,975.75 679.13,958.66 U5.6
NRST_1: C29.2 R10.1 U5.7 | length 155.9
  Top1 w4: C29.2 554,982 586,982 R10.1 623,983 659.45,946.55 U5.7
PWM_A_1: U5.29 U6.27 | length 259.2
  Top1 w4: U6.27 528.54,485.2 533.34,490 611,490 639.76,518.76 U5.29
PWM_B_1: U5.30 U6.25 | length 216.9
  Top1 w4: U6.25 579.72,469.38 587.34,477 615,477 659.45,521.45 U5.30
PWM_C_1: U5.31 U6.23 | length 187.7
  Top1 w4: U6.23 630.91,477.41 679.13,525.64 U5.31
SENSE_A_1: U2.8 U5.10 | length 1401.8
  Top1 w4: v1(393.7,462.6) 393.7,433.07 338.63,378 174,378 148,404 148,744 272.75,868.75 591.75,868.75 600.39,877.39 U5.10
  Bottom4 w4: v1(393.7,462.6) 482.28,462.6 501,443.88 501,393.99 ; U2.8 500.98,393.97
SENSE_B_1: U3.8 U5.11 | length 1702.5
  Top1 w4: v1(393.7,305.12) 335.82,363 165,363 131,397 131,747 262,878 576,878 580.71,882.71 U5.11
  Bottom4 w4: v1(393.7,305.12) 426.82,272 806,272 835.63,301.63 U3.8
SPI1_CS_1: MA730.5 U5.14 | length 541.5
  Top1 w4: U5.14 685.39,836.61 v1(735,787)
  Bottom4 w4: MA730.5 732.85,610.24 740.72,602.36 771.65,602.36 789,619.71 789,733 v1(735,787)
SPI1_MISO_1: MA730.7 U5.16 | length 378.9
  Top1 w4: U5.16 551.76,797.24 553.99,795.01 563,786 563,706 v1(564,705)
  Bottom4 w4: v1(564,705) 564,626 620,570 653,570 659.45,576.45 MA730.7
SPI1_MOSI_1: MA730.4 U5.17 | length 478.5
  Top1 w4: U5.17 542.44,777.56 547,773 547,696 566,677 598,677 646,725 754,725 772,707 v1(772,668)
  Bottom4 w4: MA730.4 747.76,639.76 772,664 v1(772,668)
SPI1_SCK_1: MA730.12 U5.15 | length 203.4
  Top1 w4: U5.15 565.07,816.93 588,794 v1(588,720)
  Bottom4 w4: v1(588,720) 590.68,717.32 590.68,708.53 600.39,698.82 MA730.12
SPI2_CS_1: P1.1 U5.25 | length 587.6
  Top1 w4: v1(561,518) U5.25
  Bottom4 w4: P1.1 227.59,771 434,771 455,750 455,660 561,554 v1(561,518)
SPI2_MISO_1: P1.3 U5.27 | length 626.2
  Top1 w4: v1(599,517) 599.7,517.7 599.7,582.33 U5.27
  Bottom4 w4: P1.3 264.23,839 407,839 482,764 482,671 599,554 v1(599,517)
SPI2_MOSI_1: P1.4 U5.28 | length 606.7
  Top1 w4: U5.28 620.54,582.57 620.54,537.46 v1(621,537)
  Bottom4 w4: P1.4 284.89,885.51 298.4,872 397,872 496,773 496,676 618.39,553.61 618.39,539.61 v1(621,537)
SPI2_SCK_1: P1.2 U5.26 | length 561.9
  Top1 w4: v1(580,539) 580.35,539.35 580.35,582.68 U5.26
  Bottom4 w4: P1.2 246.91,804 418,804 469,753 469,666 577.89,557.11 577.89,541.11 v1(580,539)
SWCLK_1: J1.1 U5.37 | length 329
  Top1 w4: U5.37 878.24,639.76 963,555 v1(1008,555)
  Bottom4 w4: v1(1008,555) 1053,555 1066.26,568.26 1089.49,568.26 1089.65,568.43 1122.38,568.43 J1.1
SWDIO_1: J1.2 U5.34 | length 483.2
  Top1 w4: U5.34 738.19,641.19 746.19,649.19 780.81,649.19 901,529 v1(1008,529)
  Bottom4 w4: v1(1008,529) 1010.43,531.43 1108.91,531.43 J1.2
UART_Rx_1: J2.2 U5.13 | length 848
  Top1 w4: v1(189,401) 188,402 184,402 164,422 164,737 283.3,856.3 U5.13
  Bottom4 w4: v1(189,401) 222.42,401 259.76,438.35 275.59,438.35 276.01,438.76 277.08,438.76 279.08,440.76 J2.2
UART_Tx_1: J2.1 U5.12 | length 1107.4
  Top1 w4: v1(199,348) 155,348 112,391 112,750 253,891 456,891 478.03,913.03 U5.12
  Bottom4 w4: v1(199,348) 223.2,348 279.45,404.25 295.28,404.25 295.69,404.67 296.77,404.67 298.77,406.67 J2.1
V3P3_1: C26.2 R11.1 U6.15 U6.16 U6.17 | length 350
  Top1 w4: U6.17 784.45,458.45 798,472 ; U6.16 810.04,459.96 798,472 ; U6.15 835.63,470.37 820,486 ; C26.2 895.67,444.33 895.67,475.33 885,486 820,486 ; 798,472 R11.1 820,486
VCC: C8.2 C9.2 C10.2 C11.2 C12.2 C21.2 D2.2 D3.2 D5.1 U6.4 U6.11 | length 2579.9
  Top1 w10: C21.2 537.64,125.64 554.64,125.64 578.82,149.82 578.82,193.98 U6.4
  Top1 w20: C21.2 537,58 561,34 786,34 889,137 ; U6.11 758.86,148.72 770.57,137 889,137 ; C11.2@1022.32,180.32 979,137 889,137
  Top1 w40: C12.2 1064.8,1012.2 1190,887 1190,503.76 1033.1,346.86 C10.2 C8.2 C11.2
  Bottom4 w20: D5.1 521.65,827.72 533.37,816 830.49,816 D2.2
  Bottom4 w40: D3.2@925.03,933.54 D3.2 928.29,933.54 D3.2@950.71,955.97
  Bottom4 w50: D2.2 845.2,835.71 847.7,838.21 847.7,856.21 D3.2@925.03,933.54
  other v1: 866,985 888.5,985 911,985 933.5,985 956,985
VCC_IN: D2.1 P3.2 | length 123.4
  Bottom4 w40: D2.1 1005.2,828.51 1010.5,823.21 1049.59,823.21 P3.2
pads on no net: MA730.1 MA730.2 MA730.3 MA730.6 MA730.9 MA730.10 MA730.11 MA730.14 MA730.15 MA730.16 P1.SH1 P1.SH2 P3.SH1 P3.SH2 U2.1 U3.1 U5.3 U5.4 U5.19 U5.20 U5.21 U5.22 U5.33 U5.39 U5.40 U5.41 U5.45 U5.46 U6.19 U6.21

## Polygon pours and split planes (outlines as drawn)
AGND on Bottom4 "AGND_L04_P006" (hatched 45Degree grid 20 track 8, remove dead copper, pour order 6): 1.78,665.77 ccw(c671.36,665.77) 671.36,-3.81 ccw(c671.36,665.77) 1340.95,665.77 ccw(c671.36,665.77) 671.36,1335.35 ccw(c671.36,665.77)
AGND on Top1 "AGND_L01_P007" (hatched 45Degree grid 20 track 8, remove dead copper, pour order 7): 1.78,665.77 ccw(c671.36,665.77) 671.36,-3.81 ccw(c671.36,665.77) 1340.95,665.77 ccw(c671.36,665.77) 671.36,1335.35 ccw(c671.36,665.77)
AGND on Gnd2 "AGND_L02_P008" (solid, remove dead copper, pour order 8): 1.78,665.77 ccw(c671.36,665.77) 671.36,-3.81 ccw(c671.36,665.77) 1340.95,665.77 ccw(c671.36,665.77) 671.36,1335.35 ccw(c671.36,665.77)
AGND on Signal3 "AGND_L03_P009" (solid, remove dead copper, pour order 9): 1.78,665.77 ccw(c671.36,665.77) 671.36,-3.81 ccw(c671.36,665.77) 1340.95,665.77 ccw(c671.36,665.77) 671.36,1335.35 ccw(c671.36,665.77)

## Keep-outs
Keep-Out Layer:
  circle w10: c671.36,665.77 r669.58
  lines w10: 331.41,712.06 ccw(c295.28,665.35) 331.81,618.96 ; 332.15,618.27 ccw(c346.46,665.35) 332.38,712.51 ; 1010.36,618.22 ccw(c1045.38,665.77) 1010.36,713.32 ; 1010.45,618.68 cw(c996.17,665.77) 1010.45,712.86

## Silkscreen, mask and mechanical layers (free items; w line width, h text height)
Top Overlay:
  text "FOC_CTRL" at 543.54,1129.22 h60
  text "12V" at 1093.12,950.7 h60 r300
  text "SPI" at 154,831.71 h60 r65
  text "JLCJLCJLC" at 526.14,720 h39.37
  text "SWD" at 1143.54,492.94 h60 r250
  text "USART" at 223.22,375.27 h60 r120
  text "Motor" at 586.1,7.97 h60